# Altium PCB PCB1.PcbDoc
Units mm, origin at the board's own origin, x right, y up, seen from the top; angles counter-clockwise.
Board outline 58.67 x 59.05 mm, 2 copper layers (Top Layer, Bottom Layer); 18 components, 14 nets, 47 pads, 4 vias.
Unrouted connection lines stored in the file: 2.
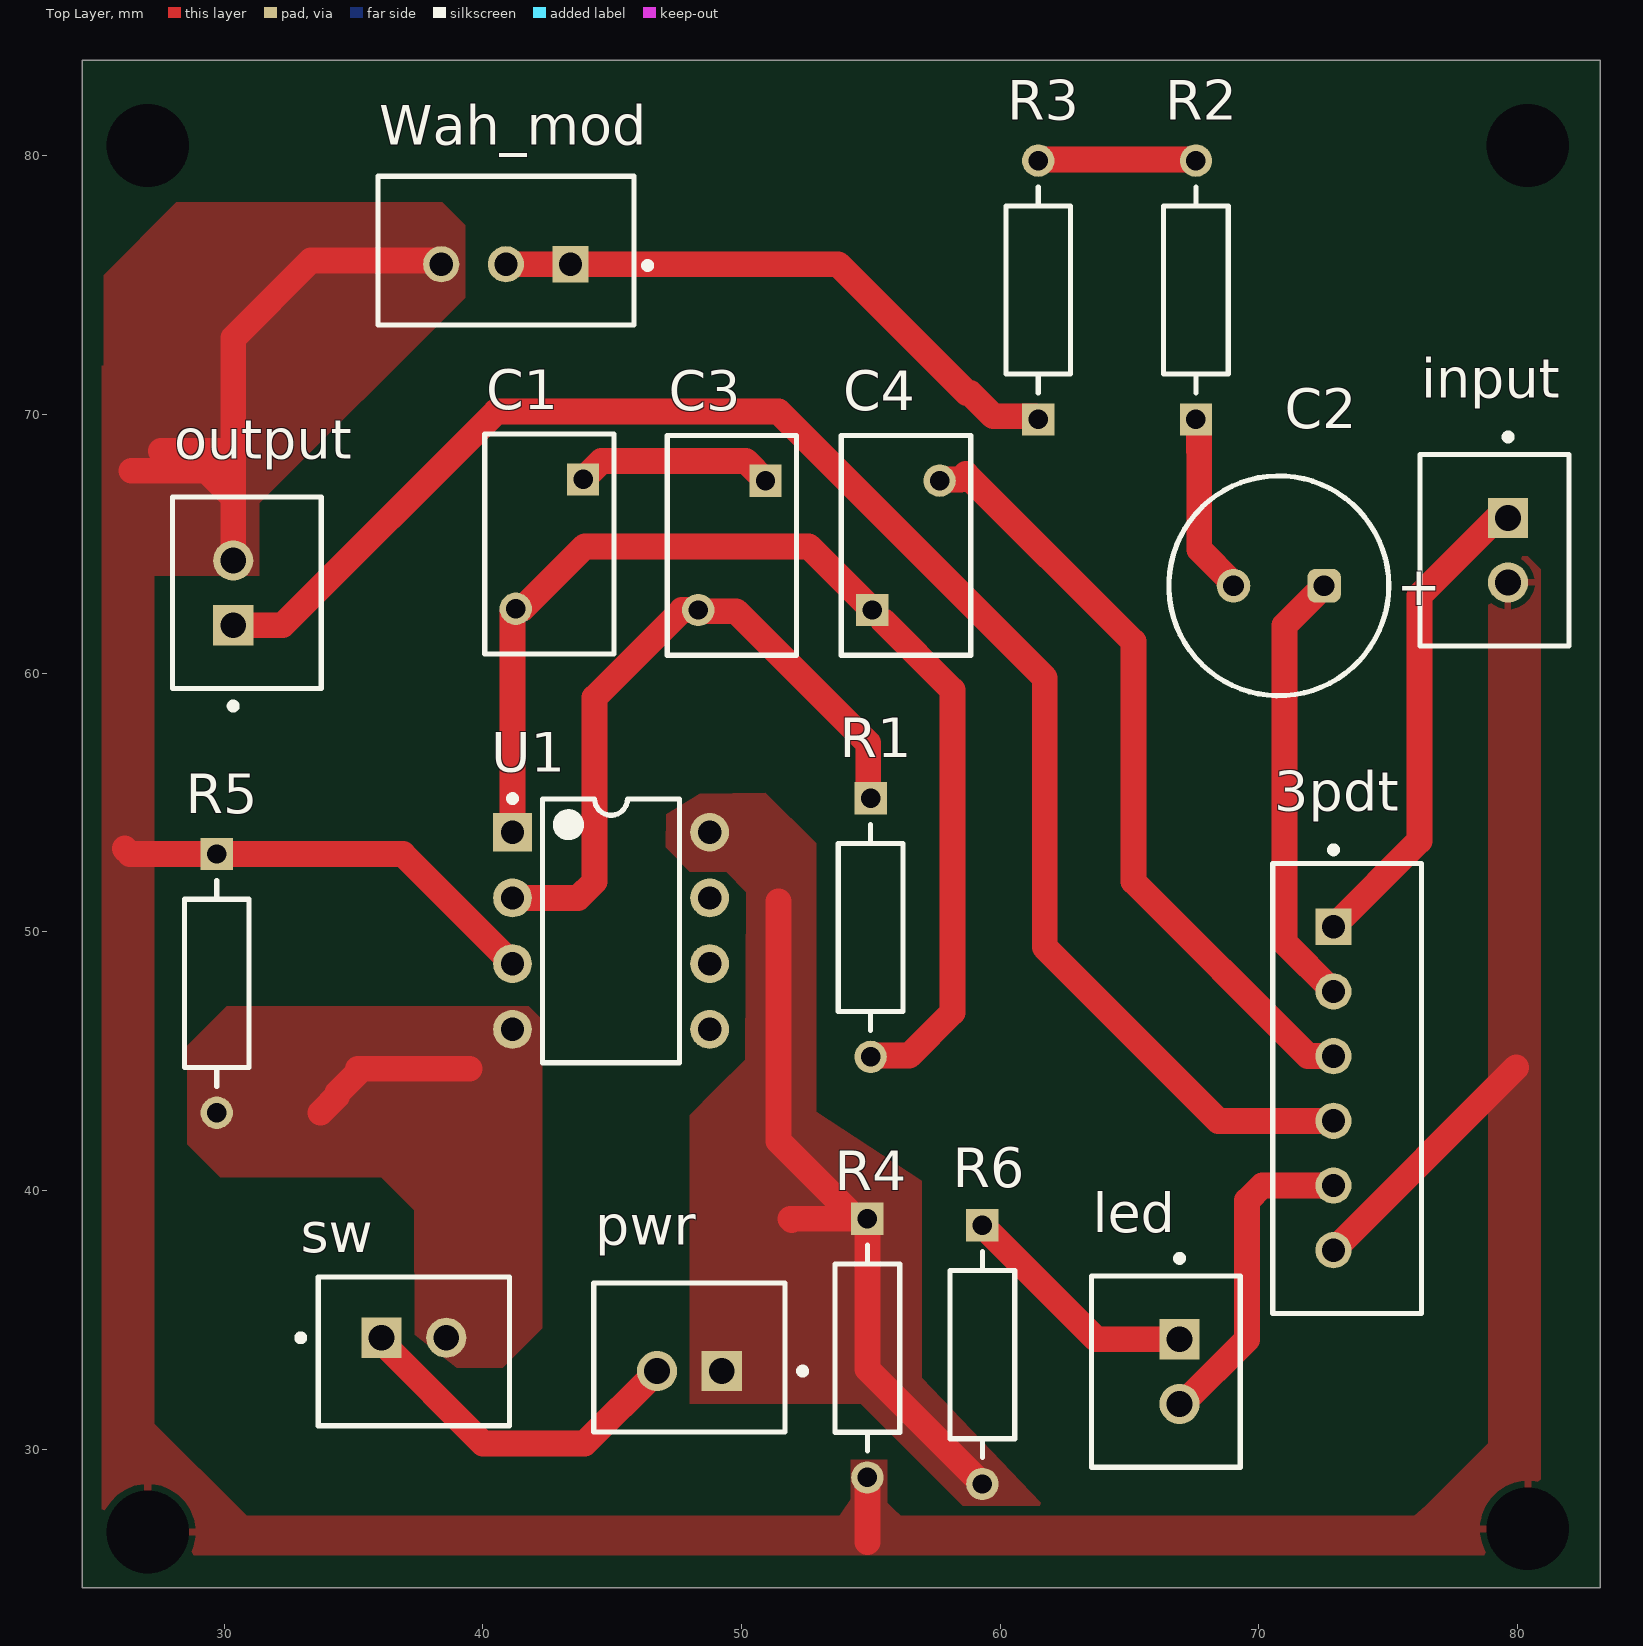
[diagram p0: Top Layer view]
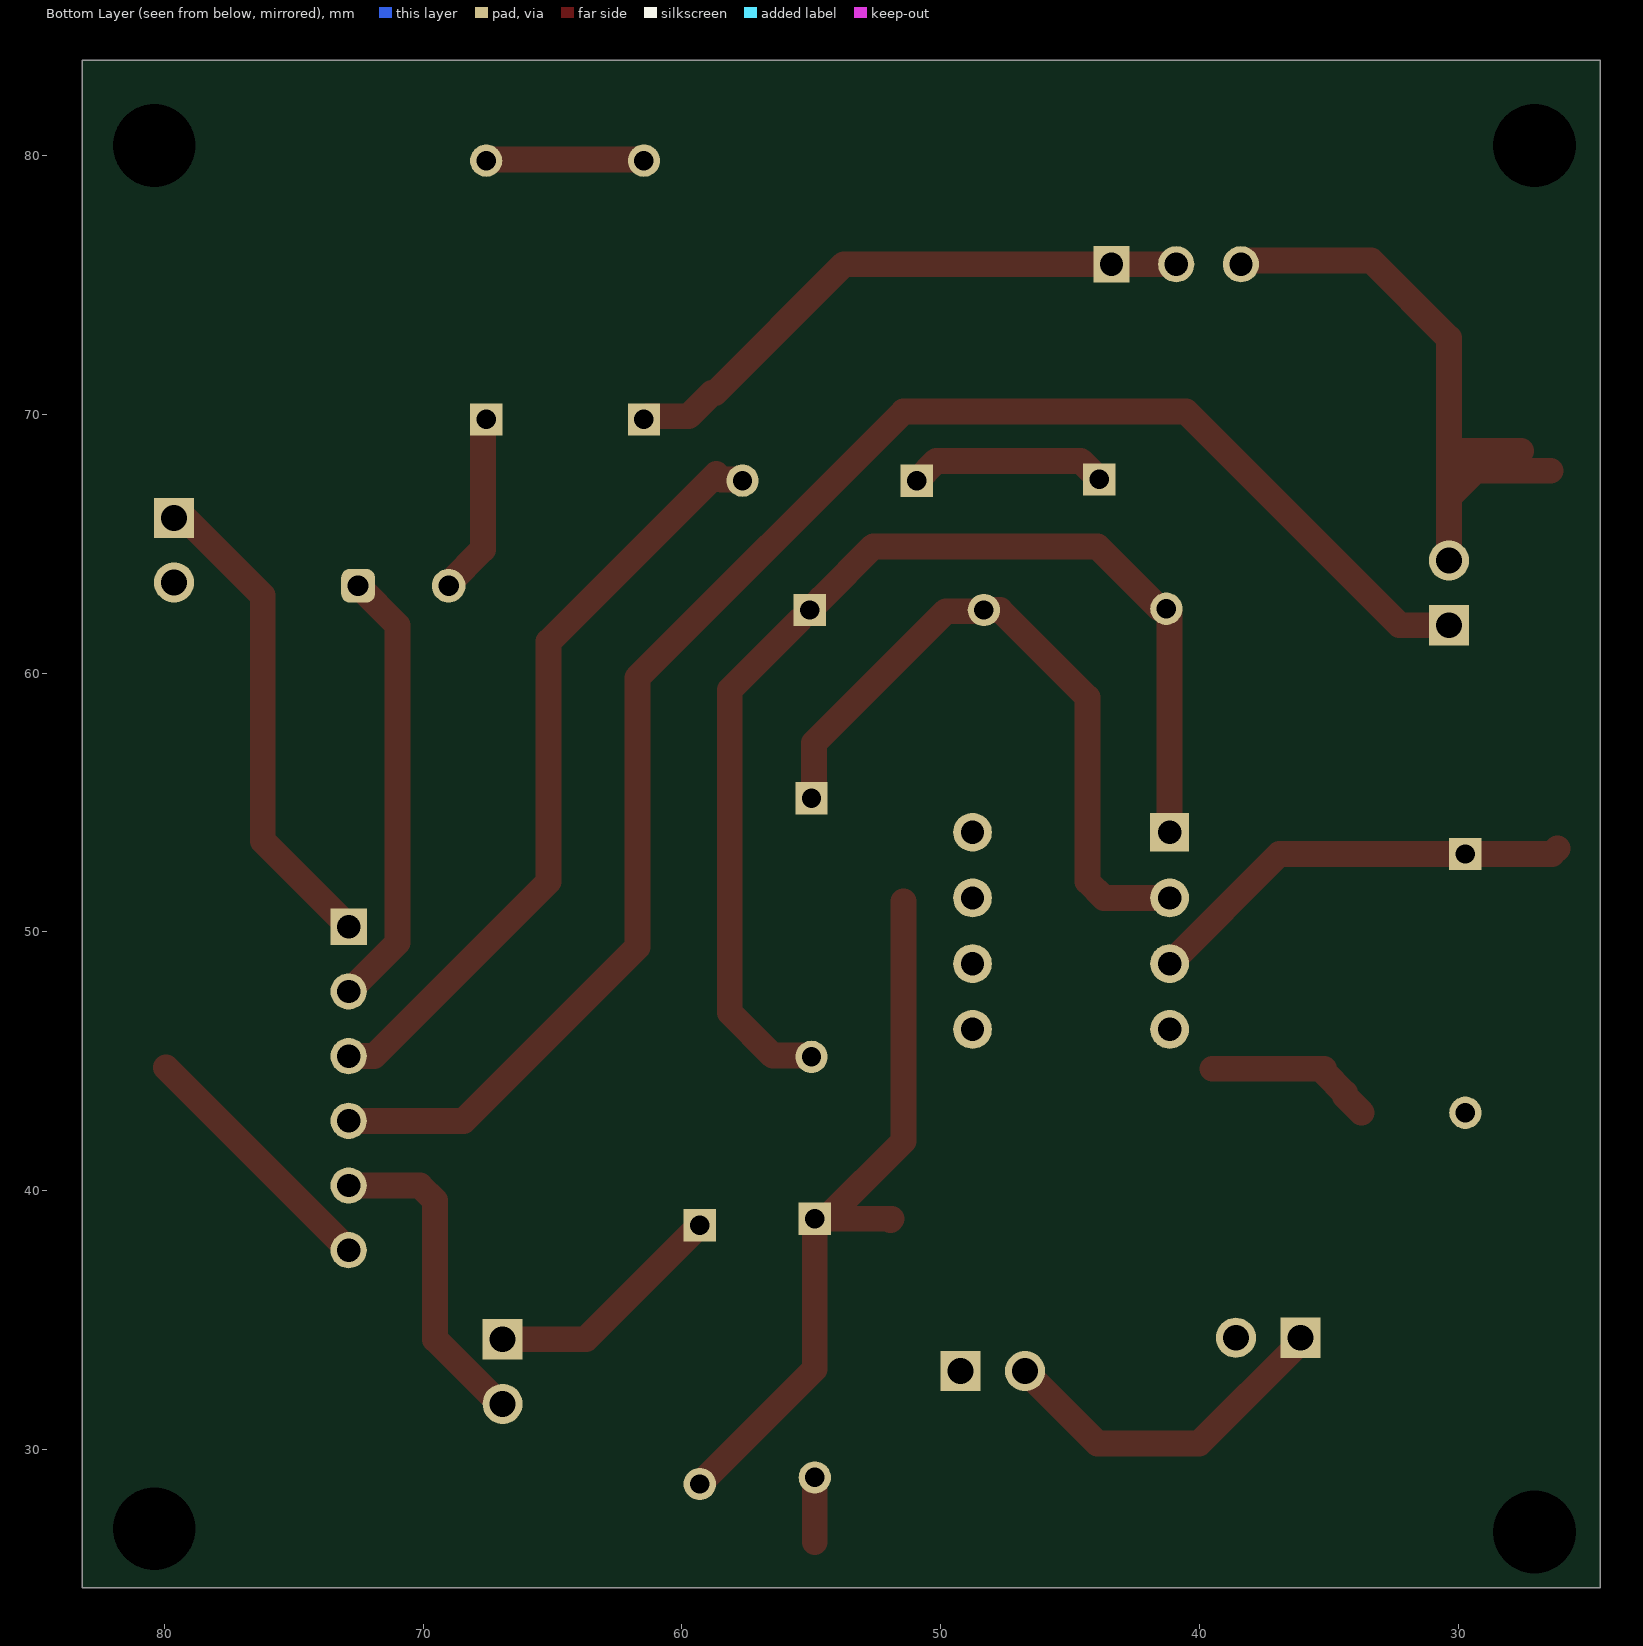
[diagram p1: Bottom Layer view, seen from below]
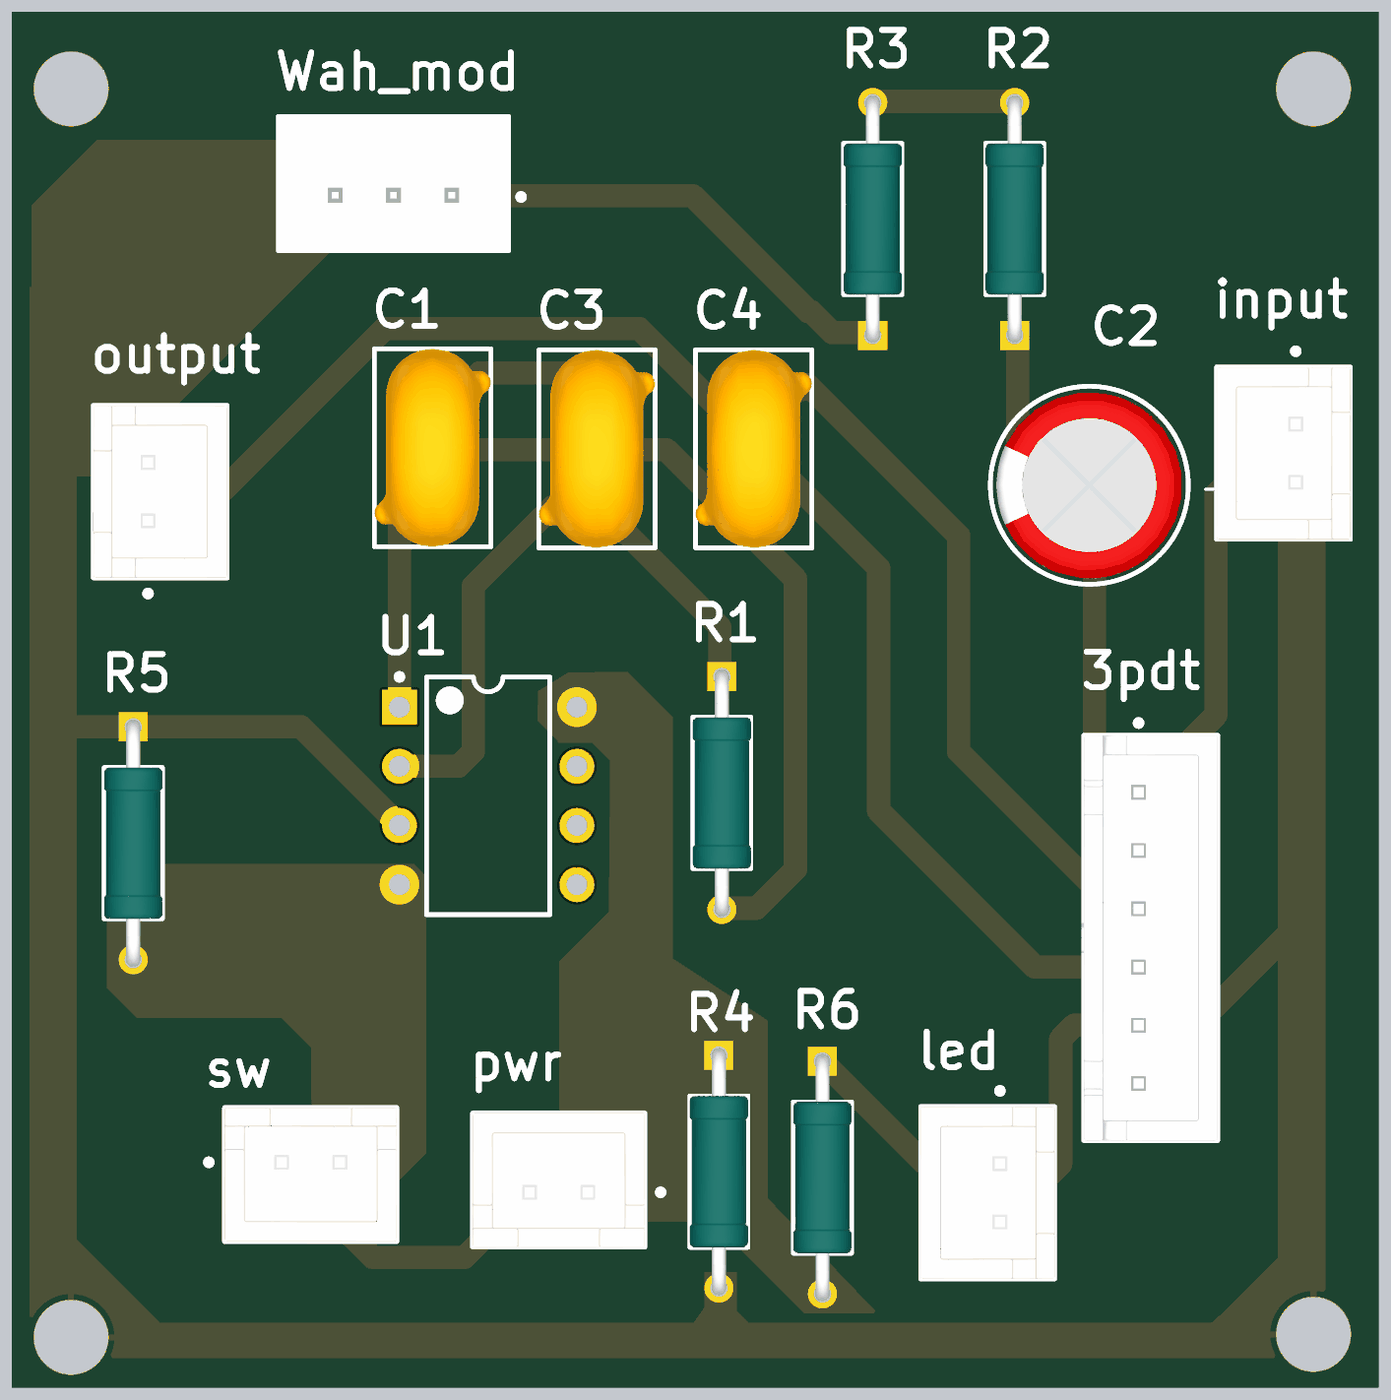
[diagram p2: 3D render of the assembled board from above, using the file's embedded part models]

## Layer stack, top to bottom
Top Solder: solder mask 0.0102, Solder Resist, Dk 3.5
Top Layer: signal copper 0.0356
Dielectric 1: dielectric 0.32, FR-4, Dk 4.8
Bottom Layer: signal copper 0.0356
Bottom Solder: solder mask 0.0102, Solder Resist, Dk 3.5

## Board outline
24.511,24.638 83.185,24.638 83.185,83.693 24.511,83.693

## Design rules (kind name [scope] priority, off if disabled: settings)
Clearance Clearance_1 [OnMid vs OnMid] p1: gap=0.254 ignorepadtopadclearanceinfootprint=FALSE sourcerule=40 cellrowname=All cellrowtype=0 cellcolname=All cellcoltype=0 innerlayers=TRUE
Clearance Clearance_2 [(ExistsOnLayer('Top Layer') Or ExistsOnLayer('Bottom Layer')) vs (ExistsOnLayer('Top Layer') Or ExistsOnLayer('Bottom Layer'))] p2: gap=0.254 ignorepadtopadclearanceinfootprint=FALSE sourcerule=40 cellrowname=All cellrowtype=0 cellcolname=All cellcoltype=0 outerlayers=TRUE
Clearance [All] p3: gap=0.254 ignorepadtopadclearanceinfootprint=FALSE ismatrix=TRUE
PolygonConnect PolygonConnect_4 [All vs IsNamedPolygon('GND_L01_P008')] p1: connectstyle=Direct reliefconductorwidth=0.254 reliefentries=4 polygonreliefangle="90 Angle" airgapwidth=0.254
PolygonConnect PolygonConnect_3 [All vs IsNamedPolygon('GND_L01_P007')] p2: connectstyle=Direct reliefconductorwidth=0.254 reliefentries=4 polygonreliefangle="90 Angle" airgapwidth=0.254
PolygonConnect PolygonConnect_2 [All vs IsNamedPolygon('+4.5V_L01_P004')] p3: connectstyle=Direct reliefconductorwidth=0.254 reliefentries=4 polygonreliefangle="90 Angle" airgapwidth=0.254
PolygonConnect PolygonConnect_1 [All vs IsNamedPolygon('-4.5V_L01_P005')] p4: connectstyle=Direct reliefconductorwidth=0.254 reliefentries=4 polygonreliefangle="90 Angle" airgapwidth=0.254
PolygonConnect [All] p5: connectstyle=Relief reliefconductorwidth=0.254 reliefentries=4 polygonreliefangle="90 Angle" airgapwidth=0.254
RoutingVias [All] p1: holewidth=0.711 width=1.27 viastyle="Through Hole" minholewidth=0.711 minwidth=1.27 maxholewidth=0.711 maxwidth=1.27
SolderMaskExpansion [All] p1: expansion=0.102 istentingtop=FALSE
Width [All] p1: maxlimit=1 minlimit=1 preferedwidth=1 minimp=50.000000 maximp=50.000000 favimp=50.000000
30 further rules are at their usual default settings.

## Classes and differential pairs
component class U_wah: C1 C2 C3 C4 R1 R2 R3 U1 Wah_mod
component class U_selection: 3pdt input led output R6
component class U_power: pwr R4 R5 sw

## Components (designator, comment, footprint, x,y, rotation, side; value= is the part's Value field where it differs from the comment)
3pdt "B6B-XH-A(LF)(SN)" FP-B6B-XH-A_LF_SN-MFG 73.406,43.942 r270 top
C1 "10n" FP-F471K33Y5RP6UK5R-MFG 42.575,64.984 r270 top
C2 "860021374009" WCAP-ATG5_D8H14 70.767,63.373 r0 top
C3 "10n" FP-F471K33Y5RP6UK5R-MFG 49.627,64.937 r270 top
C4 "10u" FP-F471K33Y5RP6UK5R-MFG 56.358,64.937 r90 top
input "B2B-XH-A(LF)(SN)" FP-B2B-XH-A_LF_SN-MFG 79.104,64.75 r270 top
led "B2B-XH-A(LF)(SN)" FP-B2B-XH-A_LF_SN-MFG 66.404,33 r270 top
output "B2B-XH-A(LF)(SN)" FP-B2B-XH-A_LF_SN-MFG 30.878,63.099 r90 top
pwr "power" FP-B2B-XH-A_LF_SN-MFG 47.986,33.545 r180 top
R1 "160k" FP-MRS25-MFG 54.991,50.165 r270 top
R2 "10K" FP-MRS25-MFG 67.564,74.803 r90 top
R3 "10K" FP-MRS25-MFG 61.468,74.803 r90 top
R4 "10K" FP-MRS25-MFG 54.864,33.909 r270 top
R5 "10K" FP-MRS25-MFG 29.718,48.006 r270 top
R6 "330" FP-MRS25-MFG 59.309,33.655 r270 top
sw "switch" FP-B2B-XH-A_LF_SN-MFG 37.338,33.782 r0 top
U1 "TL072CP" P0008A 44.958,50.038 r0 top
Wah_mod "B3B-XH-A(LF)(SN)" FP-B3B-XH-A_LF_SN-MFG 40.894,76.327 r180 top

## Footprints (in the part's own frame and the unit in brackets; to place one, negate y for a bottom-side part, rotate by r counter-clockwise, add the part's x,y. Pads: shape width x height; smd on the part's side, far side on the other; paste and mask are expansions set on the pad)
FP-B2B-XH-A_LF_SN-MFG [mm]
  rect 1.55x1.55 hole 1 paste-2539.97 mask+0: 1(-1.25,0.525)
  round 1.55 hole 1 paste-2539.97 mask+0: 2(1.25,0.525)
  silkscreen extent -4.5,-2.88 3.7,2.88, body extent -3.8,-2.98 3.8,2.98, height 0.25
FP-B3B-XH-A_LF_SN-MFG [mm]
  rect 1.4x1.4 hole 0.9 paste-2539.97 mask+0: 1(-2.5,0.525)
  round 1.4 hole 0.9 paste-2539.97 mask+0: 2(0,0.525) 3(2.5,0.525)
  silkscreen extent -5.6,-2.88 4.95,2.88, body extent -5.05,-2.98 5.05,2.98, height 0.25
FP-B6B-XH-A_LF_SN-MFG [mm]
  rect 1.4x1.4 hole 0.9 paste-2539.97 mask+0: 1(-6.25,-0.525)
  round 1.4 hole 0.9 paste-2539.97 mask+0: 2(-3.75,-0.525) 3(-1.25,-0.525) 4(1.25,-0.525) 5(3.75,-0.525) 6(6.25,-0.525)
  silkscreen extent -9.35,-2.88 8.7,2.88, body extent -8.8,-2.98 8.8,2.98, height 0.25
FP-F471K33Y5RP6UK5R-MFG [mm]
  rect 1.25x1.25 hole 0.75 paste-2539.97 mask+0: 1(-2.5,1.3)
  round 1.25 hole 0.75 paste-2539.97 mask+0: 2(2.5,-1.3)
  silkscreen extent -4.25,-2.5 4.25,2.5, body extent -4.35,-2.6 4.35,2.6, height 0.25
FP-MRS25-MFG [mm]
  rect 1.25x1.25 hole 0.75 paste-2539.97 mask+0: 1(-5,0)
  round 1.25 hole 0.75 paste-2539.97 mask+0: 2(5,0)
  silkscreen extent -3.98,-1.25 3.98,1.25, body extent -5.73,-1.35 5.73,1.35, height 0.25
P0008A [mm] "DIP, 8-Leads, Body 10.15x6.6mm, Pitch 2.54mm"
  rect 1.5x1.5 hole 0.9: 1(-3.81,3.81)
  round 1.5 hole 0.9: 2(-3.81,1.27) 3(-3.81,-1.27) 4(-3.81,-3.81) 5(3.81,-3.81) 6(3.81,-1.27) 7(3.81,1.27) 8(3.81,3.81)
  silkscreen extent -3.93,-5.1 2.65,5.23, body extent -3.95,-5.07 3.95,5.07, height 5.08
WCAP-ATG5_D8H14 [mm] "Aluminum Electrolytic Capacitors, 8x14mm"
  rrect50% 1.3x1.3 hole 0.8: 1(1.75,0)
  round 1.3 hole 0.8: 2(-1.75,0)
  silkscreen extent -4.25,-4.25 4.25,4.25, body extent -3.99,-4 4,4, height 14.31

## Part data
3pdt: library part CMP-17439-000076-1, "CONN HEADER VERT 6POS 2.5MM"
C1 C3 C4: library part CMP-02417-000080-1, "CAP CER 470PF 2KV Y5R RADIAL", Capacitance=470pF, Case/Package=Radial, Dielectric=Y5R, Dielectric Material=Ceramic, Insulation Resistance=10GR, Max Operating Temperature=125°C, Min Operating Temperature=-30°C, Package Quantity=1500, Tolerance=10%, Voltage=2kV, Construction=RADIAL, Depth=5mm, Lead Diameter=0.8mm, Lead Pitch=5mm, Lead/Base Style=Kinked, Length=8.5mm, Mount="Through Hole", Packaging="Tape and Reel", Radiation Hardening=No, Resistor Type=Ceramic, RoHS Compliant=Yes, Series=F, Termination=Radial, Voltage Rating=2kV
C2: library part CMP-03913-53914274-1, "860021374009 WCAP-ATG5 Aluminum Electrolytic Capacitors", Capacitance=6.8µF, Case/Package=Radial, Leakage Current=81.6µA, Max Operating Temperature=105°C, Min Operating Temperature=-25°C, Ripple Current=75mA, Tolerance=20%, Voltage Rating=400V, Diameter=8mm, Height=14mm, Height - Seated (Max)=15.494mm, Lead Pitch=3.5052mm, Length=14mm, Life (Hours)=2000hours, Mount="Through Hole", NexarPartId=53914274, Packaging="Tape & Box (TB)", Pitch=3.5mm, Polarity=Polar, REACH SVHC=Unknown, RoHS=Compliant, Voltage Rating (DC)=400V
input led output pwr sw: library part CMP-2000-05888-3, "CONN HEADER VERT 2POS 2.5MM", Color=Natural, Contact Resistance=20mR, Current Rating=3A, Housing Color=White, Insulation Resistance=1GR, Max Operating Temperature=85°C, Max Voltage Rating (AC)=250V, Min Operating Temperature=-25°C, Connector Type="Male Pin", Contact Material=Brass, Contact Plating=Tin, Contact Type="Male Pin", Depth=5.75mm, Fastening Type=Detent, Housing Material=Polyamide, Lead Free="Lead Free", Lead Pitch=2.5mm, Length=7.4mm, Max Current Rating=3A, Max Voltage Rating (DC)=250V, Mount="Through Hole", Number of Contacts=2, Number of Positions=2, Number of Rows=1, Orientation=Straight, Packaging=Bulk, Pitch=2.5mm, REACH SVHC="No SVHC", Series=XH, Termination=Solder, Voltage Rating=250V, Voltage Rating (AC)=250V, Wire/Cable Gauge=22AWG
R1 R2 R3 R4 R5 R6: library part CMP-00030-42757237-1, "MRS25000C1000FRP00 Resistor, 100 Ohm, ± 1%, 600 mW, Axial Leaded, Metal Film (Thin Film), Professional", Case/Package=Axial, Max Operating Temperature=155°C, Max Power Dissipation=600mW, Min Operating Temperature=-55°C, Resistance=100Ω, Temperature Coefficient=50ppm/°C, Tolerance=1%, Voltage Rating=350V, Composition="Metal Film, Thin Film", Contact Plating=Tin, Diameter=2.5mm, Lead Diameter=600µm, Lead Free="Lead Free", Length=6.5mm, Military Standard=Not, Mount="Through Hole", NexarPartId=42757237, Number of Pins=2, Number of Terminations=2, Packaging="Tape & Reel (TR)", Power Rating=600mW, Radiation Hardening=No, REACH SVHC=Unknown, RoHS=Compliant, Schedule B="8533210090, 8533210090", Termination=Axial, Voltage Rating (DC)=350V, Width=2.5mm
U1: library part CMP-0017-00950-2, "Dual Low-Noise JFET-Input General-Purpose Operational Amplifier, 7 to 36 V, 0 to 70 degC, 8-pin DIP (P8), Pb-Free (RoHS)", Manufacturer="Texas Instruments", Rating=Catalog, Total Supply Voltage(Max)(+5V is 5, +/-5V is 10)=36, Total Supply Voltage(Min)(+5V is 5, +/-5V is 10)=7, CMRR(Min)(dB)=70, Code_JEDEC=MS-001, ComponentLink1Description="Manufacturer URL", ComponentLink1URL=http://www.ti.com/, ComponentLink2Description=Datasheet, ComponentLink2URL=http://www.ti.com/lit/ds/symlink/tl072.pdf, ComponentLink3Description="Package Specification", ComponentLink3URL=http://www.ti.com/litv/pdf/mpdi001b, DatasheetVersion=SLOS080J, Eco-Plan="Pb-Free (RoHS)", GBW(Typ)(MHz)=3, IIB(Max)(pA)=200, Iq per channel(Max)(mA)=2.5, Mounting Technology="Through Hole", Number of Channels=2, Offset Drift(Typ)(uV/C)=18, PackageDescription="8-Pin Plastic In-Line, Body 9.59 x 6.35 mm, Pitch 2.54 mm", PackageReference=P0008A, PackageVersion="4040082/E, 04/2010", PartNumber=TL072CP, Slew Rate(Typ)(V/us)=13, Sub Family="General Purpose Amplifier, High Supply Voltage Amplifier (>=30V)", Vio (25C)(Max)(mV)=10, Vn at 1kHz(Typ)(nV/rtHz)=18
Wah_mod: library part CMP-17439-000014-3, "CONN HEADER VERT 3POS 2.5MM", Color=Natural, Contact Resistance=20mR, Current Rating=3A, Flammability Rating="UL94 V-0", Housing Color=White, Insulation Resistance=1GR, Max Operating Temperature=85°C, Max Voltage Rating (AC)=250V, Min Operating Temperature=-25°C, Connector Type=Header, Contact Finish - Mating=TIN, Contact Material=Brass, Contact Plating=Tin, Contact Shape=Square, Contact Type="Male Pin", Depth=5.75mm, Fastening Type=Detent, Gender=Male, Housing Material=Polyamide, Insulation Color=Natural, Insulation Material=Nylon, Lead Free="Lead Free", Lead Pitch=2.5mm, Length=9.9mm, Max Current Rating=3A, Max Voltage Rating (DC)=250V, Mount="Through Hole", Number of Contacts=3, Number of Positions=3, Number of Rows=1, Orientation=Straight, Packaging=Bulk, Pitch=2.5mm, REACH SVHC="No SVHC", Series=XH, Termination=Solder, Voltage Rating=250V, Voltage Rating (AC)=250V, Wire/Cable Gauge=22AWG

## Via types
v1: diameter 0.6/0.6 (per signal layer), hole 3.2, Top Layer to Bottom Layer, 4 vias

## Nets (pads, with @x,y where several pads share a name; then routed paths per layer and width w, separated by ;. In a path a pad name is that pad's centre, name@x,y a point inside that pad or via, vN(x,y) a via of type N, cw(c..) or ccw(c..) an arc to the next point about the centre after c; other vN are vias at no path point)
+4.5V: pwr.1 R4.1 R6.2 U1.8 | length 28.6
  Top Layer w1: 51.435,51.181 51.435,41.91 R4.1@54.436,38.909 ; 51.943,38.862 51.896,38.909 R4.1@54.436,38.909 ; R6.2 54.864,33.1 R4.1 R4.1@54.436,38.909
-4.5V: pwr.2 R5.2 sw.1 sw.2 U1.4 | length 20.5
  Top Layer w1: 33.727,43.006 34.376,43.656 34.376,43.766 35.179,44.569 35.179,44.704 39.49,44.704 ; sw.1 36.088,34.143 40.005,30.226 43.942,30.226 pwr.2 ; sw.2 sw.2@38.588,34.423 ; U1.4@41.014,46.228 U1.4
C_in: 3pdt.2 C2.1 | length 17.1
  Top Layer w1: C2.1 70.993,61.849 70.993,49.58 3pdt.2
C_out: 3pdt.3 C4.2 | length 30.1
  Top Layer w1: C4.2 57.706,67.485 58.468,67.485 58.674,67.691 65.151,61.214 65.151,51.943 71.902,45.192 3pdt.3
GND: 3pdt.6 input.2 output.2 R4.2 R5.1 U1.3 Wah_mod.3 | length 54.6
  Top Layer w1: 26.162,53.213 26.369,53.006 R5.1 36.91,53.006 U1.3 ; 26.416,67.818 29.337,67.818 30.353,66.802 ; 27.559,68.58 29.845,68.58 30.353,68.072 ; output.2 30.353,66.802 ; Wah_mod.3 38.286,75.802 38.142,75.946 33.354,75.946 30.353,72.945 30.353,68.072 ; 54.864,26.416 R4.2 ; 3pdt.6 79.945,44.756 ; 30.353,66.802 30.353,68.072
  other v1: 27.051,26.797 80.391,26.924
inputSignal: 3pdt.1 input.1 | length 18.8
  Top Layer w1: 3pdt.1 76.2,53.511 76.2,62.992 79.208,66 input.1
LED_neg: 3pdt.5 led.2 | length 12.6
  Top Layer w1: led.2 67.045,31.75 69.539,34.244 69.539,39.606 70.125,40.192 3pdt.5
NetC1_1: C1.1 C3.1 R2.2 R3.2 | length 13.8
  Top Layer w1: C1.1 44.59,68.199 50.165,68.199 C3.1 ; R3.2 61.516,79.851 63.125,79.851 65.907,79.851 67.516,79.851 R2.2
NetC1_2: C1.2 C4.1 R1.2 U1.1 | length 44.6
  Top Layer w1: U1.1 41.148,62.357 C1.2 41.529,62.484 43.942,64.897 52.598,64.897 54.62,62.875 C4.1 ; R1.2 55.039,45.213 56.483,45.213 58.15,46.88 58.15,59.345 C4.1@55.475,62.02
NetC2_2: C2.2 R2.1 | length 7
  Top Layer w1: R2.1 67.689,69.678 67.689,68.577 67.691,68.575 67.691,64.78 69.017,63.454 C2.2
NetC3_2: C3.2 R1.1 U1.2 | length 26.8
  Top Layer w1: U1.2 43.688,51.308 44.323,51.943 44.323,59.055 47.705,62.437 C3.2 48.375,62.389 49.799,62.389 54.898,57.29 54.898,55.258 R1.1
Netled_1: led.1 R6.1 | length 9.4
  Top Layer w1: R6.1 60.777,37.187 63.714,34.25 led.1
NetR3_1: R3.1 Wah_mod.1 Wah_mod.2 | length 23.1
  Top Layer w1: Wah_mod.2 Wah_mod.1 53.738,75.802 58.721,70.819 58.843,70.819 59.734,69.928 61.343,69.928 R3.1
outputSignal: 3pdt.4 output.1 | length 63.4
  Top Layer w1: output.1 32.258,61.849 40.513,70.104 51.435,70.104 61.722,59.817 61.722,49.403 68.433,42.692 3pdt.4
pads on no net: U1.5 U1.6 U1.7
copper on no net:
  other v1: 27.051,80.391 80.391,80.391

## Polygon pours and split planes (outlines as drawn)
GND on Top Layer "GND_L01_P010" (solid, pour order 10): 27.102,31.191 30.988,27.305 28.58,27.305 27.005,28.879
GND on Top Layer "GND_L01_P009" (solid, pour order 9): 76.454,27.813 79.121,30.48 79.513,30.088 79.513,28.205 78.105,26.797 75.057,26.797 75.524,27.009
GND on Top Layer "GND_L01_P008" (solid, pour order 8): 53.518,27.051 56.515,27.051 55.626,27.94 55.626,29.591 54.229,29.591 54.229,28.067
GND on Top Layer "GND_L01_P007" (solid, pour order 7): 28.159,78.197 38.429,78.197 39.318,77.308 39.318,74.514 31.369,66.564 31.369,63.754 26.868,63.754 25.346,63.474 25.346,75.384
-4.5V on Top Layer "-4.5V_L01_P005" (solid, pour order 5): 29.845,40.513 31.623,40.513 36.068,40.513 37.357,39.229 37.373,34.423 38.989,33.147 40.767,33.147 42.291,34.671 42.291,46.609 41.783,47.117 30.099,47.117 28.575,45.593 28.575,41.783
+4.5V on Top Layer "+4.5V_L01_P004" (solid, pour order 4): 48.387,55.332 47.097,54.54 47.072,53.266 48.004,52.316 49.411,52.316 50.191,51.536 50.137,45.056 49.01,43.927 49.004,43.927 48.004,42.917 48.004,31.75 54.61,31.75 58.547,27.813 61.686,27.813 56.974,32.753 56.974,33.969 56.975,40.386 52.89,43.053 52.89,53.425 50.916,55.369
GND on Top Layer "GND_L01_P003" (solid, pour order 3): 27.305,25.908 27.305,71.882 25.273,71.882 25.273,26.67 26.035,25.908
GND on Top Layer "GND_L01_P000" (solid, pour order 0): 78.867,64.008 78.867,26.607 80.709,26.607 80.899,26.797 80.899,28.765 80.899,64.008 80.391,64.516 79.375,64.516
GND on Top Layer "GND_L01_P001" (solid, pour order 1): 26.67,27.432 80.899,27.432 80.899,26.797 80.01,25.908 26.67,25.908

## Text inside footprints (layer, text, board x,y; h text height)
C2: Top Overlay "+" at 75.317,62.623 h1.5